# Altium PCB FullPCB.PcbDoc
Units mm, origin at the board's own origin, x right, y up, seen from the top; angles counter-clockwise.
Board outline 128.27 x 38.1 mm, 2 copper layers (Top Layer, Bottom Layer); 98 components, 52 nets, 246 pads, 2 vias.
Unrouted connection lines stored in the file: 25.
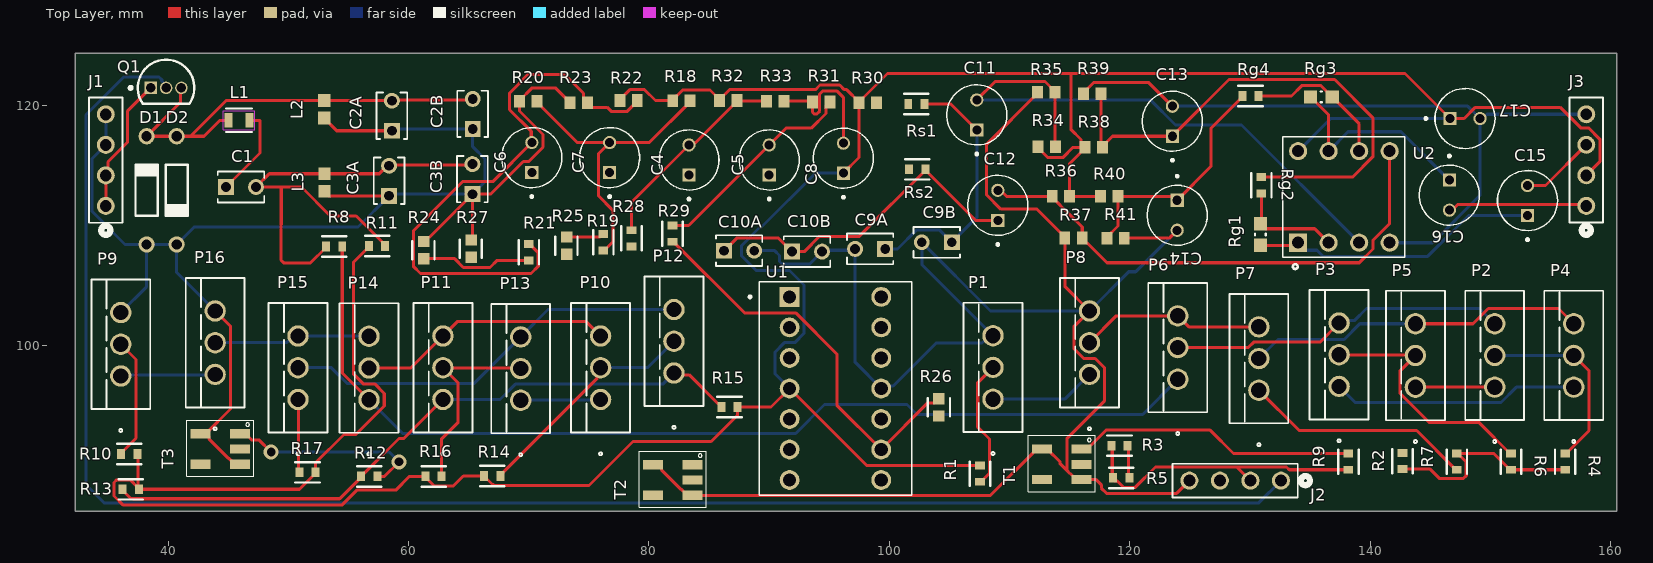
[diagram p0: Top Layer view]
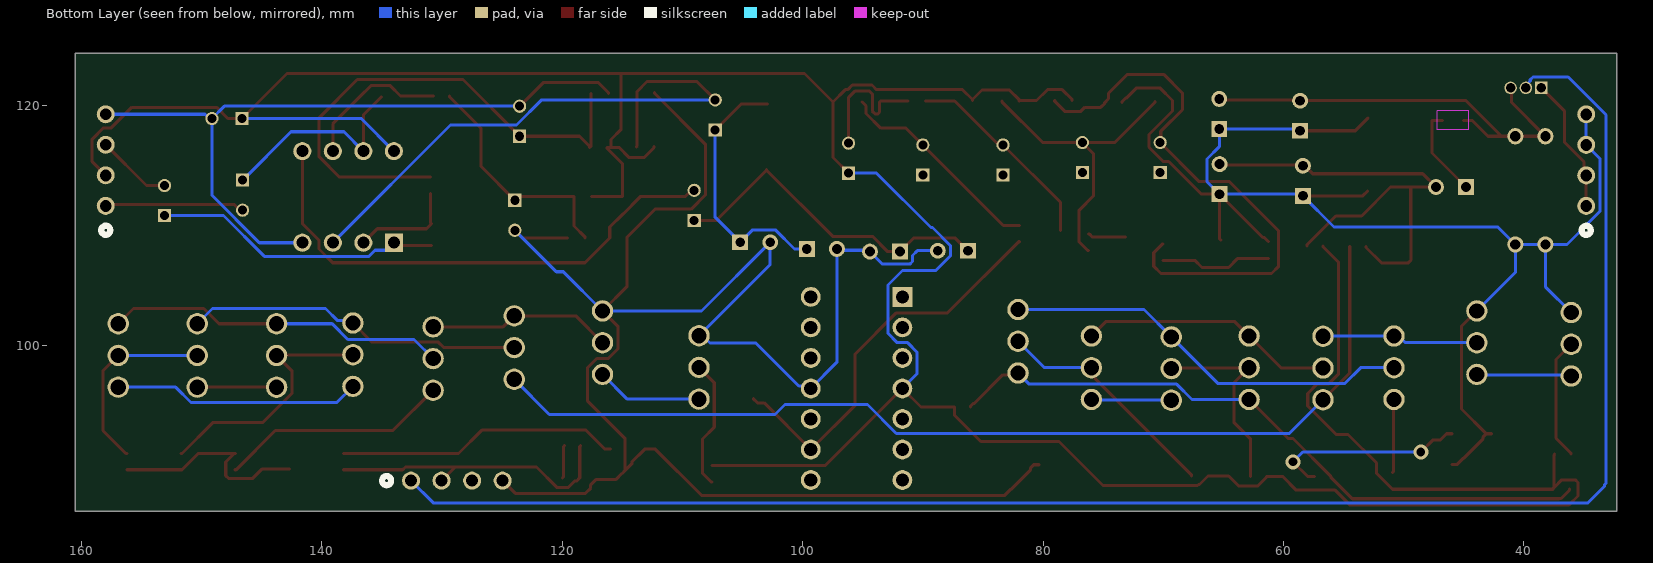
[diagram p1: Bottom Layer view, seen from below]
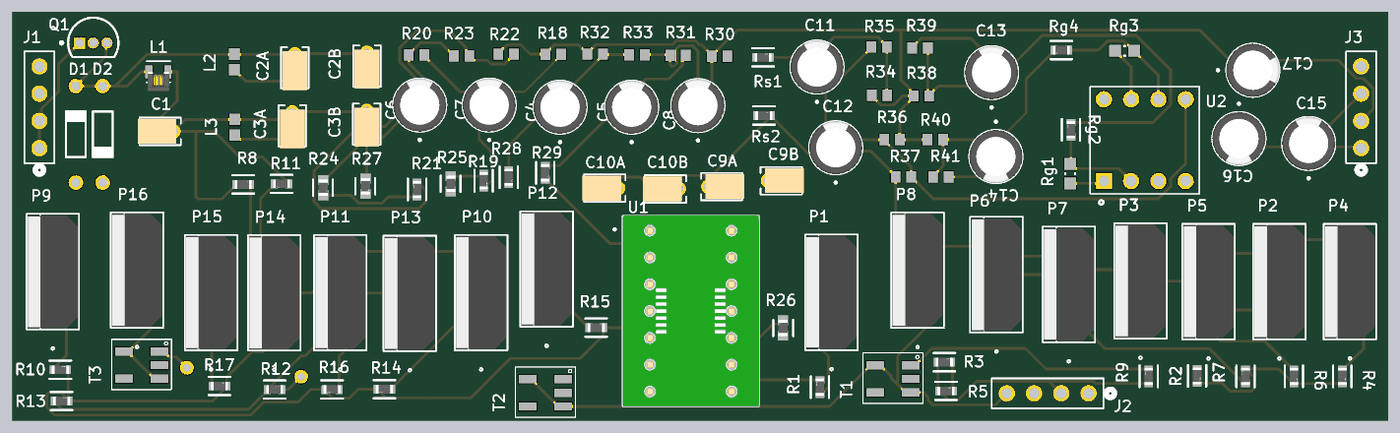
[diagram p2: 3D render of the assembled board from above, using the file's embedded part models]

## Layer stack, top to bottom
Top Solder: solder mask 0.0102, Solder Resist, Dk 3.5
Top Layer: signal copper 0.0356
Dielectric 1: dielectric 0.32, FR-4, Dk 4.8
Bottom Layer: signal copper 0.0356
Bottom Solder: solder mask 0.0102, Solder Resist, Dk 3.5

## Board outline
32.258,86.233 32.258,124.333 160.528,124.333 160.528,86.233

## Design rules (kind name [scope] priority, off if disabled: settings)
Clearance [All] p1: gap=0.254 ignorepadtopadclearanceinfootprint=FALSE
PolygonConnect [All] p1: connectstyle=Relief reliefconductorwidth=0.254 reliefentries=4 polygonreliefangle="90 Angle" airgapwidth=0.254
RoutingVias [All] p1: holewidth=0.711 width=1.27 viastyle="Through Hole" minholewidth=0.711 minwidth=1.27 maxholewidth=0.711 maxwidth=1.27
SolderMaskExpansion [All] p1: expansion=0.102 istentingtop=FALSE
SupplyNets "Schematic Supply Nets" [InNet('GND')] p1: voltage=0.000
Width [All] p1: maxlimit=0.254 minlimit=0.254 preferedwidth=0.254
30 further rules are at their usual default settings.

## Classes and differential pairs
component class U_SeriesSwitch: Antenna Q1
component class "U_Quadrature Mixers": P1 P2 P3 P4 P5 P6 P8 P9 P10 P11 P12 P13 P14 P15 P16 R1 R2 R3 R4 R5 R6 R7 R8 R9 R10 R11 R12 R13 R14 R15 R16 R17 T1 T2 T3
component class U_Limiter: D1 D2
component class "U_Differential Opamp": C4 C5 C6 C7 C8 R18 R19 R20 R21 R22 R23 R24 R25 R26 R27 R28 R29 R30 R31 R32 R33 U1
component class U_Bandpass: *1 *2 *3 C1 C2A C2B C3A C3B L1 L2 L3
component class "FULL HIERARCHICAL SCHEMATIC": J1 J2 J3
component class "U_Lowpass Amplifier": C9A C9B C10A C10B C11 C12 C13 C14 C15 C16 C17 R34 R35 R36 R37 R38 R39 R40 R41 Rg1 Rg2 Rg3 Rg4 Rs1 Rs2

## Components (designator, comment, footprint, x,y, rotation, side; value= is the part's Value field where it differs from the comment)
C1 "K103K10X7RF53L2" K103K10X7RF53L2_VIS 44.8,113.2 r0 top
C2A "K103K10X7RF53L2" K103K10X7RF53L2_VIS 58.606,117.882 r90 top
C2B "K103K10X7RF53L2" K103K10X7RF53L2_VIS 65.331,118.032 r90 top
C3A "K103K10X7RF53L2" K103K10X7RF53L2_VIS 58.375,112.465 r90 top
C3B "K103K10X7RF53L2" K103K10X7RF53L2_VIS 65.306,112.607 r90 top
C4 "ECA1CM100I" CAPPRD250W50D500H1100 83.325,115.45 r90 top
C5 "ECA1CM100I" CAPPRD250W50D500H1100 90,115.45 r90 top
C6 "ECA1CM100I" CAPPRD250W50D500H1100 70.25,115.65 r90 top
C7 "ECA1CM100I" CAPPRD250W50D500H1100 76.725,115.65 r90 top
C8 "ECA1CM100I" CAPPRD250W50D500H1100 96.175,115.6 r90 top
C9A "K103K10X7RF53L2" K103K10X7RF53L2_VIS 99.65,108.05 r180 top
C9B "K103K10X7RF53L2" K103K10X7RF53L2_VIS 105.2,108.6 r180 top
C10A "K103K10X7RF53L2" K103K10X7RF53L2_VIS 86.25,107.9 r0 top
C10B "K103K10X7RF53L2" K103K10X7RF53L2_VIS 91.9,107.825 r0 top
C11 "ECA1CM100I" CAPPRD250W50D500H1100 107.275,119.2 r90 top
C12 "ECA1CM100I" CAPPRD250W50D500H1100 109.025,111.675 r90 top
C13 "ECA1CM100I" CAPPRD250W50D500H1100 123.55,118.675 r90 top
C14 "ECA1CM100I" CAPPRD250W50D500H1100 123.95,110.85 r270 top
C15 "ECA1CM100I" CAPPRD250W50D500H1100 153.1,112.075 r90 top
C16 "ECA1CM100I" CAPPRD250W50D500H1100 146.6,112.525 r270 top
C17 "ECA1CM100I" CAPPRD250W50D500H1100 147.9,118.9 r0 top
D1 "1N4148" NXP-SOD27-2_V 38.2,112.925 r90 top
D2 "1N4148" NXP-SOD27-2_V 40.7,112.925 r270 top
J1 "PRPC004SAAN-RC" CONN4_PRPC004_SUL#1 34.8,111.63 r270 top
J2 "PRPC004SAAN-RC" CONN4_PRPC004_SUL#1 132.585,88.77 r0 top
J3 "PRPC004SAAN-RC" CONN4_PRPC004_SUL#2 157.99,111.635 r270 top
L1 "MURATA_LQW21FT2R0M0HL" MURATA_LQW21FT2R0M0HL_0 45.895,118.75 r0 top
L2 "BRC1608TR50M6" INDC1608X100N 52.975,119.675 r90 top
L3 "BRC1608TR50M6" INDC1608X100N 53.006,113.579 r90 top
P1 "IRF9640PBF" TO220AB_VIS 108.625,95.55 r90 top
P2 "IRF9640PBF" TO220AB_VIS 150.371,96.548 r90 top
P3 "IRF9640PBF" TO220AB_VIS 137.422,96.609 r90 top
P4 "IRF9640PBF" TO220AB_VIS 156.947,96.548 r90 top
P5 "IRF9640PBF" TO220AB_VIS 143.772,96.544 r90 top
P6 "IRF9640PBF" TO220AB_VIS 124,97.2 r90 top
P7 "IRF9640PBF" TO220AB_VIS 130.747,96.284 r90 top
P8 "IRF9640PBF" TO220AB_VIS 116.65,97.61 r90 top
P9 "IRF9640PBF" TO220AB_VIS 36.05,97.475 r90 top
P10 "IRF9640PBF" TO220AB_VIS 75.975,95.525 r90 top
P11 "IRF9640PBF" TO220AB_VIS 62.85,95.525 r90 top
P12 "IRF9640PBF" TO220AB_VIS 82.075,97.725 r90 top
P13 "IRF9640PBF" TO220AB_VIS 69.325,95.45 r90 top
P14 "IRF9640PBF" TO220AB_VIS 56.7,95.5 r90 top
P15 "IRF9640PBF" TO220AB_VIS 50.8,95.525 r90 top
P16 "IRF9640PBF" TO220AB_VIS 43.9,97.61 r90 top
Q1 "BS170" ONSC-TO-92-3-29-11 39.82,121.45 r0 top
R1 "RC0603FR-071KL" FP-RC0603-0_55-IPC_C 107.55,89.35 r90 top
R2 "RC0603FR-0710KL" FP-RC0603-0_55-IPC_C 142.703,90.398 r270 top
R3 "RC0603FR-0710KL" FP-RC0603-0_55-IPC_C 119.148,91.675 r0 top
R4 "RC0603FR-071KL" FP-RC0603-0_55-IPC_C 156.236,90.352 r270 top
R5 "RC0603FR-0710KL" FP-RC0603-0_55-IPC_C 119.3,89 r0 top
R6 "RC0603FR-071KL" FP-RC0603-0_55-IPC_C 151.725,90.352 r270 top
R7 "RC0603FR-0710KL" FP-RC0603-0_55-IPC_C 147.214,90.352 r90 top
R8 "RC0603FR-0725R5L" FP-RC0603-0_55-IPC_C 53.8,108.25 r0 top
R9 "RC0603FR-0725R5L" FP-RC0603-0_55-IPC_C 138.192,90.352 r90 top
R10 "RC0603FR-071KL" FP-RC0603-0_55-IPC_C 36.75,90.975 r0 top
R11 "RC0603FR-0710KL" FP-RC0603-0_55-IPC_C 57.373,108.3 r180 top
R12 "RC0603FR-0725R5L" FP-RC0603-0_55-IPC_C 56.727,89.125 r0 top
R13 "RC0603FR-0710KL" FP-RC0603-0_55-IPC_C 36.873,88.05 r0 top
R14 "RC0603FR-071KL" FP-RC0603-0_55-IPC_C 66.952,89.15 r180 top
R15 "RC0603FR-0710KL" FP-RC0603-0_55-IPC_C 86.698,94.9 r0 top
R16 "RC0603FR-071KL" FP-RC0603-0_55-IPC_C 62.075,89.125 r180 top
R17 "RC0603FR-0710KL" FP-RC0603-0_55-IPC_C 51.582,89.46 r0 top
R18 "ERJ-3EKF1003V" RESC1608X55X30ML15T15 82.7,120.375 r180 top
R19 "RC0603FR-071KL" FP-RC0603-0_55-IPC_C 76.2,108.598 r270 top
R20 "ERJ-3EKF1003V" RESC1608X55X30ML15T15 69.95,120.325 r0 top
R21 "RC0603FR-071KL" FP-RC0603-0_55-IPC_C 70,107.773 r90 top
R22 "ERJ-3EKF1003V" RESC1608X55X30ML15T15 78.3,120.4 r180 top
R23 "ERJ-3EKF1003V" RESC1608X55X30ML15T15 74.15,120.225 r0 top
R24 "CRCW06035K05FKEA" FP-CRCW0603-e3-IPC_B 61.25,107.95 r270 top
R25 "CRCW06035K05FKEA" FP-CRCW0603-e3-IPC_B 73.15,108.315 r270 top
R26 "CRCW06035K05FKEA" FP-CRCW0603-e3-IPC_B 104.1,94.865 r90 top
R27 "CRCW06035K05FKEA" FP-CRCW0603-e3-IPC_B 65.2,108.075 r270 top
R28 "RC0603FR-071KL" FP-RC0603-0_55-IPC_C 78.55,108.925 r270 top
R29 "RC0603FR-071KL" FP-RC0603-0_55-IPC_C 81.95,109.325 r270 top
R30 "ERJ-3EKF1003V" RESC1608X55X30ML15T15 98.2,120.2 r180 top
R31 "ERJ-3EKF1003V" RESC1608X55X30ML15T15 94.325,120.275 r0 top
R32 "ERJ-3EKF1003V" RESC1608X55X30ML15T15 86.6,120.4 r180 top
R33 "ERJ-3EKF1003V" RESC1608X55X30ML15T15 90.5,120.35 r180 top
R34 "ERJ-3EKF1003V" RESC1608X55X30ML15T15 113.1,116.55 r180 top
R35 "ERJ-3EKF1003V" RESC1608X55X30ML15T15 113.05,121.075 r0 top
R36 "ERJ-3EKF1003V" RESC1608X55X30ML15T15 114.275,112.425 r0 top
R37 "ERJ-3EKF1003V" RESC1608X55X30ML15T15 115.325,108.96 r0 top
R38 "ERJ-3EKF1003V" RESC1608X55X30ML15T15 117,116.5 r180 top
R39 "ERJ-3EKF1003V" RESC1608X55X30ML15T15 116.875,120.975 r0 top
R40 "ERJ-3EKF1003V" RESC1608X55X30ML15T15 118.3,112.425 r180 top
R41 "ERJ-3EKF1003V" RESC1608X55X30ML15T15 118.825,108.95 r180 top
Rg1 "RC0603FR-07330KL" RESC0603(1608)_M 130.875,109.25 r270 top value="330000.00 Ohm"
Rg2 "RC0603FR-0710KL" FP-RC0603-0_55-IPC_C 130.95,113.348 r90 top
Rg3 "RC0603FR-07330KL" RESC0603(1608)_M 135.95,120.7 r180 top value="330000.00 Ohm"
Rg4 "RC0603FR-0710KL" FP-RC0603-0_55-IPC_C 130.048,120.775 r180 top
Rs1 "RC0603FR-0710KL" FP-RC0603-0_55-IPC_C 102.25,120.1 r0 top
Rs2 "RC0603FR-0710KL" FP-RC0603-0_55-IPC_C 102.325,114.675 r0 top
T1 "CX2040LNLT" CX2040LNLT 116.002,91.39 r90 top
T2 "CX2040LNLT" CX2040LNLT 83.627,90.09 r90 top
T3 "CX2040LNLT" CX2040LNLT 45.975,92.67 r90 top
U1 "LCQT-TSSOP14" ARIES_LCQT-TSSOP14 95.51,96.44 r0 top
U2 "1-2199298-2" TE_1-2199298-2 137.825,112.375 r90 top

## Footprints (in the part's own frame and the unit in brackets; to place one, negate y for a bottom-side part, rotate by r counter-clockwise, add the part's x,y. Pads: shape width x height; smd on the part's side, far side on the other; paste and mask are expansions set on the pad)
ARIES_LCQT-TSSOP14 [mm]
  rect 1.65x1.65 / inner round 1.65 / far side rect 1.65x1.65 hole 1.1: 1(-3.81,7.62)
  round 1.65 hole 1.1: 2(-3.81,5.08) 3(-3.81,2.54) 4(-3.81,0) 5(-3.81,-2.54) 6(-3.81,-5.08) 7(-3.81,-7.62) 8(3.81,-7.62) 9(3.81,-5.08) 10(3.81,-2.54) 11(3.81,0) 12(3.81,2.54) 13(3.81,5.08) 14(3.81,7.62)
  silkscreen extent -7.2,-8.89 6.35,8.89, body extent -6.35,-8.89 6.35,8.89, height 5
CAPPRD250W50D500H1100 [mm]
  round 1.1 hole 0.75: N(1.25,0)
  rect 1.1x1.1 hole 0.75: P(-1.25,0)
  silkscreen extent -3.35,-2.5 2.5,2.5, body extent -2.5,-2.5 2.5,2.5, height 11
CONN4_PRPC004_SUL#1 [mil]
  round 59 / inner round 60 / far side round 59 hole 39 paste-99999 mask+0: 1(0,0) 2(-100,0) 3(-200,0) 4(-300,0)
  silkscreen extent -355,-55 95,55
CONN4_PRPC004_SUL#2 [mil]
  round 59 / inner round 60 / far side round 59 hole 39 paste-99999 mask+0: 2(-100,0) 3(-200,0) 4(-300,0) pt(0,0)
  silkscreen extent -355,-55 95,55
CX2040LNLT [mil] "RF AND WIRELESS BALUN TRANSFORMER"
  rect 30x65 smd: 1(0,0) 2(-50,0) 3(-100,0) 4(0,130) 6(-100,130)
  silkscreen extent -140,-45 45,175
FP-CRCW0603-e3-IPC_B [mm]
  rect 0.935x0.962 smd paste+0 mask+0: 1(-0.715,0) 2(0.715,0)
  silkscreen extent -0.75,-0.95 0.75,0.9, body extent -1.43,-0.73 1.43,0.73, height 0.25
FP-RC0603-0_55-IPC_C [mm]
  rect 0.659x0.812 smd paste+0 mask+0: 1(-0.677,0) 2(0.677,0)
  silkscreen extent -1.01,-0.85 1.01,0.85, body extent -1.11,-0.55 1.11,0.55, height 0.25
INDC1608X100N [mm]
  rect 1.06x1.02 smd: 1(-0.728,0) 2(0.728,0)
K103K10X7RF53L2_VIS [mil]
  rect 52x52 / inner round 60 / far side rect 52x52 hole 32 paste-99999 mask+0: 1(0,0)
  round 52 / inner round 60 / far side round 52 hole 32 paste-99999 mask+0: 2(98.43,0)
  silkscreen extent -27,-50 125,50, body extent -33,-46 109,46, height 142
MURATA_LQW21FT2R0M0HL_0 [mm]
  rect 0.66x1.2 smd: 1(-0.88,0) 2(0.88,0)
  Keep-Out Layer lines w0.1: -1.31,-0.8 1.31,-0.8 1.31,0.8 -1.31,0.8 -1.31,-0.8
  silkscreen extent -1.1,-0.98 1.1,0.98, body extent -1,-1.8 1,0, height 0.6
NXP-SOD27-2_V [mm] "SOD27, 2-Leads, Dia 1.85mm, Body Length 4.25mm, Pin Spacing 9mm"
  round 1.35 hole 0.85: 1(-4.5,0) 2(4.5,0)
  silkscreen extent -2.12,-0.93 2.13,0.92, body extent -4.78,-0.92 4.78,0.92, height 1.84
ONSC-TO-92-3-29-11 [mm] "TO, 3-Leads, Body Dia 4.7mm, Pitch 1.27mm"
  rect 1.05x1.05 hole 0.8: 1(-1.27,0)
  round 1.05 hole 0.8: 2(0,0) 3(1.27,0)
  silkscreen extent -3.07,-1.34 2.35,2.35, body extent -2.35,-1.33 2.36,2.36, height 7.87
RESC0603(1608)_M [mm] "Chip Resistor, Body 1.6x0.8mm, IPC Low Density"
  rect 1.1x1.1 smd: 1(-0.9,0) 2(0.9,0)
  silkscreen extent -0.05,-0.45 0.05,0.45, body extent -0.85,-0.47 0.85,0.47, height 0.6
RESC1608X55X30ML15T15 [mm] "Chip Resistor, 2-Leads, Body 1.60x0.80mm, IPC Low Density"
  rect 0.9x1.05 smd: 1(-0.725,0) 2(0.725,0)
  body extent -0.87,-0.48 0.87,0.48, height 0.55
TE_1-2199298-2 [mm]
  rect 1.508x1.508 hole 1: 1(-3.81,3.81)
  round 1.508 hole 1: 2(-3.81,1.27) 3(-3.81,-1.27) 4(-3.81,-3.81) 5(3.81,-3.81) 6(3.81,-1.27) 7(3.81,1.27) 8(3.81,3.81)
  silkscreen extent -6,-5.08 5,5.08
TO220AB_VIS [mil]
  round 70 / inner round 60 / far side round 70 hole 50 paste-99999 mask+0: 1(0,0) 2(103.94,0) 3(207.87,0)
  silkscreen extent -183,-96 316,97, body extent -103,-91 311,91, height 600

## Part data
C1 C2A C2B C3A C3B C9A C9B C10A C10B P1 P2 P3 P4 P5 P6 P7 P8 P9 P10 P11 P12 P13 P14 P15 P16: "No Description Available", Mfr_Name=Vishay
  C1 C2A C2B C3A C3B C9A C9B C10A C10B: Type="Ceramic Capacitor"
C4 C5 C6 C7 C8 C11 C12 C13 C14 C15 C16 C17: "10ÂµF 16V Aluminum Electrolytic Capacitors Radial, Can 2000 Hrs @ 85Â°C", Package="RADIAL-2 Panasonic", Check_prices=https://www.snapeda.com/parts/ECA1CM100I/Panasonic/view-part/?ref=eda, Digi-Key_Part_Number=P19513TB-ND, MF=Panasonic, MP=ECA1CM100I, SnapEDA_Link=https://www.snapeda.com/parts/ECA1CM100I/Panasonic/view-part/?ref=snap
D1 D2: library part CMP-0648-00002-1, "High-speed Diode, 100 V, 450 mA, 2-Pin SOD27, RoHS", Manufacturer="NXP Semiconductors", Cd="4 pF Max.", ComponentLink1Description="Manufacturer URL", ComponentLink1URL=http://www.nxp.com/, ComponentLink2Description=Datasheet, ComponentLink2URL=http://www.nxp.com/documents/data_sheet/1N4148_1N4448.pdf, ComponentLink3Description="Package Specification", ComponentLink3URL=http://www.nxp.com/documents/data_sheet/1N4148_1N4448.pdf, Configuration=Single, DatasheetVersion=Aug-04, IF="200 mA Max.", IFRM="450 mA", IFSM="4 A Max.", IR (VR="20 V)=25 nA", Mounting Technology="Through Hole", PackageDescription="2-Pin Hermetically Sealed Glass Package, Axial Leaded, Dia 1.85 mm, Body Length 4.25 mm, Lead Spread 25.4 mm", PackageReference=SOD27, PackageVersion=Aug-04, PartNumber=1N4148, RoHS=TRUE, Trr="4 ns Max.", VF (IF="10 mA)=1 V", VR="100 V Max."
J1 J2 J3: "No Description Available", Mfr_Name=Sullins, RefDes=RefDes, Type="Headers, Male Pins"
L1: "FIXED IND 2UH 450MA POWRTRN", Package=None, Check_prices=https://www.snapeda.com/parts/LQW21FT2R0M0HL/Murata/view-part/?ref=eda, Digi-Key_Part_Number=490-LQW21FT2R0M0HLTR-ND, MF="Murata Electronics", MP=LQW21FT2R0M0HL, Purchase-URL=https://pricing.snapeda.com/search/part/LQW21FT2R0M0HL/?ref=eda, SnapEDA_Link=https://www.snapeda.com/parts/LQW21FT2R0M0HL/Murata/view-part/?ref=snap
L2 L3: "Inductor Power Chip Wirewound 500nH 20% 6MHz Ferrite 1.05A 117mOhm DCR 0603 T/R", Package=None, Availability=Unavailable, MP=BRC1608TR50M6, Price=None
Q1: library part CMP-1058-00929-1, "Small Signal MOSFET, 500 mA, 60 V, N-Channel, 3-Pin TO-92, Bulk Box", Manufacturer="On Semiconductor", Package Type=TO-92, Channel Polarity="N Channel", ComponentLink1Description="Manufacturer URL", ComponentLink1URL=http://www.onsemi.com/, ComponentLink2Description=Datasheet, ComponentLink2URL=http://www.onsemi.com/pub_link/Collateral/BS170-D.PDF, ComponentLink3Description="Package Specification", ComponentLink3URL=http://www.onsemi.cn/pub_link/Collateral/2N6426-D.PDF, Configuration=Single, DatasheetVersion="Rev. 6", ID Max (A)=0.5, Mounting Technology="Through Hole", PackageDescription="3-Pin Transistor Outline, Body 4.825 x 3.685 mm, Pitch 1.27 mm", PackageReference=TO-92-3-29-11_AM_SL, PackageVersion="Rev. AM", Packing="Bulk Box", PartNumber=BS170, PD Max (W)=0.35, V(BR)DSS Min (V)=60, VGS Max (V)=20, VGS(th) Max (V)=3
R1 R4 R6 R8 R9 R10 R12 R14 R16 R19 R21 R28 R29: library part CMP-1659-00009-5, "RES 1K OHM 1% 1/10W 0603", Case Code (Imperial)=0603, Case Code (Metric)=1608, Max Operating Temperature=155°C, Max Power Dissipation=100mW, Min Operating Temperature=-55°C, Resistance=1kR, Resistance Tolerance=1%, Resistor Type="Thick Film", Temperature Coefficient=100ppm/°C, Voltage Rating=50V, Case/Package=0603, Construction=Rectangular, Contact Plating=Tin, Depth=0.8mm, Features="Moisture Resistant", Height=0.45mm, Lead Free="Lead Free", Length=1.6mm, Military Standard=Not, Number of Terminations=2, Packaging="Tape and Reel", Power Rating=100mW, Radiation Hardening=No, REACH SVHC="No SVHC", RoHS Compliant=Yes, Series=RC, Size Code=0603, Technology="THICK FILM", Termination=SMD/SMT, Tolerance=1%
R2 R3 R5 R7 R11 R13 R15 R17 Rg2 Rg4 Rs1 Rs2: library part CMP-2100-03664-2, "RES 10K OHM 1% 1/10W 0603", Case Code (Imperial)=0603, Case Code (Metric)=1608, Max Operating Temperature=155°C, Max Power Dissipation=100mW, Min Operating Temperature=-55°C, Resistance=10kR, Resistance Tolerance=1%, Resistor Type="Thick Film", Temperature Coefficient=100ppm/°C, Voltage Rating=75V, Voltage Rating (DC)=50V, Case/Package=0603, Construction=Rectangular, Depth=0.8mm, Features="Moisture Resistant", Height=0.45mm, Lead Free="Lead Free", Lead Pitch=0.3mm, Length=1.6mm, Military Standard=Not, Number of Pins=2, Number of Terminations=2, Packaging="Tape and Reel", Power Rating=100mW, RoHS Compliant=Yes, Series=RC, Size Code=0603, Termination=SMD/SMT, Tolerance=1%, Weight=7.1E-05oz, Width=0.8mm
R18 R20 R22 R23 R30 R31 R32 R33 R34 R35 R36 R37 R38 R39 R40 R41: library part CMP-2000-00182-1, Manufacturer=Panasonic, Part Number=ERJ-3EKF1003V
R24 R25 R26 R27: library part CMP-02407-010650-1, "RES Thick Film, 5.05kΩ, 1%, 0.1W, 100ppm/°C, 0603", Case Code (Imperial)=0603, Case Code (Metric)=1608, Max Operating Temperature=155°C, Max Power Dissipation=100mW, Min Operating Temperature=-55°C, Package Quantity=5000, Resistance=5.05kR, Temperature Coefficient=100ppm/°C, Tolerance=1%, Voltage Rating=75V, Case/Package=0603, Composition="Thick Film", Features="Automotive AEC-Q200", Height=0.02inch, Lead Free="Lead Free", Length=0.061inch, Number of Pins=2, Number of Terminations=2, Packaging="Tape and Reel", Power Rating=100mW, Termination=SMD/SMT, Voltage Rating (DC)=75V, Weight=7.1E-05oz, Width=0.85mm
Rg1 Rg3: library part CMP-1012-00793-1, "330K 0.1W 1% 0603 (1608 Metric)  SMD", Case-EIA=0603, Case-Metric=1608, Power="0.1 W", Tolerance="1 %", Technology=SMT
T1 T2 T3: "BALUN 1MHZ-500MHZ 75/75 5SMD MOD", Frequency Range="1MHz ~ 500MHz", Manufacturer="Pulse Electronics", Max Operating Temperature="85 °C", Min Operating Temperature="-40 °C", Package="5-SMD Module", Depth=3.81mm, Insertion Loss (Max)=0.9dB, Length=3.81mm, Manufacturer Part=CX2040LNLT, Mounting Type="Surface Mount", Number of Pins=5, RoHS Compliant=Yes, Transformer Type="RF and Wireless Balun"
U1: "SOCKET ADAPTER TSSOP TO 14DIP", Package="TSSOP-14 Aries", Check_prices=https://www.snapeda.com/parts/LCQT-TSSOP14/Aries+Electronics/view-part/?ref=eda, MF="Aries Electronics", MP=LCQT-TSSOP14, SnapEDA_Link=https://www.snapeda.com/parts/LCQT-TSSOP14/Aries+Electronics/view-part/?ref=snap
U2: "8 _2 x 4_ Pos DIP, 0.3 _7.62mm_ Row Spacing Socket Tin Through Hole", Package=None, Availability=Unavailable, MF="TE Connectivity", MP=1-2199298-2, Price=None, SnapEDA_Link=https://www.snapeda.com/parts/1-2199298-2/TE%20Connectivity%20AMP%20Connectors/view-part/2761758/?ref=snap, TE_purchase_URL=https://www.te.com/usa-en/product-1-2199298-2.html?te_bu=Cor&te_type=disp&te_campaign=seda_glo_cor-seda-global-disp-prtnr-fy19-seda-model-bom-cta_sma-317_1&elqCampaignId=32493

## Via types
v1: diameter 1.27, hole 0.711, Top Layer to Bottom Layer, 2 vias

## Nets (pads, with @x,y where several pads share a name; then routed paths per layer and width w, separated by ;. In a path a pad name is that pad's centre, name@x,y a point inside that pad or via, vN(x,y) a via of type N, cw(c..) or ccw(c..) an arc to the next point about the centre after c; other vN are vias at no path point)
5V: C8.P C17.P J3.2 R1.2 R2.2 R3.2 R4.2 R5.2 R6.2 R7.2 R10.2 R11.2 R13.2 R14.2 R15.2 R16.2 R17.2 R18.2 R22.2 R30.2 R32.2 R34.2 R36.2 R38.2 R40.2 U1.4 U2.8 | length 306
  Top Layer w0.254: R10.2 37.488,90.913 R13.2@37.488,88.188 ; R11.2 56.697,108.223 55.43,106.957 55.43,97.614 56.224,96.82 57.176,96.82 57.97,96.026 57.97,94.974 55.607,92.611 54.622,92.611 52.258,90.247 R17.2 52.258,89.383 50.925,88.05 R13.2 37.55,88.127 R13.2@37.488,88.188 ; R22.2 77.575,120.475 78.406,121.306 79.633,121.306 80.539,120.4 81.95,120.4 R18.2 81.975,120.45 82.806,121.281 85.069,121.281 R32.2@85.875,120.475 ; R32.2 R32.2@85.875,120.475 ; C8.P 97.475,115.65 R30.2 R30.2@97.475,120.275 ; R1.2 98.113,90.027 U1.4 90.16,94.9 R15.2 87.375,94.225 85.175,92.025 78.675,92.025 75.013,88.363 67.141,88.363 67.054,88.45 66.975,88.45 R14.2 64.55,89.15 63.738,88.338 62.109,88.338 61.398,89.048 R16.2 60.078,89.125 58.926,87.973 55.693,87.973 54.475,86.755 36.217,86.755 35.486,87.486 35.486,88.614 35.709,88.837 36.84,88.837 R13.2@37.488,88.188 ; R34.2 112.375,116.475 113.206,115.644 114.433,115.644 115.289,116.5 R38.2 116.275,116.425 115,115.15 R36.2 R40.2 ; R38.2@116.025,116.503 115.952,116.576 115.952,117.148 115.1,118 115.1,122.647 ; R3.2 119.901,91.599 119.901,89.076 R5.2 ; U2.8 U2.8@134.215,116.385 ; R2.2 145.002,89.722 145.758,88.965 147.778,88.965 148.001,89.188 148.001,90.318 147.291,91.028 R7.2 150.295,91.028 151.648,89.675 R6.2 R4.2 ; J3.2 159.12,115.305 159.12,117.183 158.179,118.125 157.522,118.125 155.816,119.831 148.764,119.831 147.833,118.9 C17.P 142.903,122.647 115.1,122.647 ; R32.2@85.875,120.475 86.706,121.306 93.849,121.306 94.232,121.689 95.868,121.689 96.251,121.306 96.444,121.306 R30.2@97.475,120.275 ; R30.2@97.475,120.275 99.847,122.647 115.1,122.647
  Bottom Layer w0.254: U1.4 90.494,97.646 90.494,99.48 91.264,100.25 92.136,100.25 92.906,101.02 92.906,105.043 91.693,106.256 88.922,106.256 87.709,107.469 87.709,108.331 89.202,109.825 89.325,109.825 93.85,114.35 C8.P ; U2.8 136.73,118.9 C17.P
GND: C2A.1 C2B.1 C3A.1 C3B.1 C8.N C9A.2 C9B.2 C10A.2 C10B.2 C13.N C14.N C17.N D1.1 D2.2 J1.3 J1.4 J2.4 J3.4 L2.1 L3.1 P1.3 P8.3 P9.3 P16.3 R20.1 R23.1 R24.1 R27.1 R31.1 R33.1 R35.1 R37.1 R39.1 R41.1 T1.3 T1.4 T2.3 T2.4 T3.3 T3.4 U1.11 U2.4 | length 362.1
  Top Layer w0.254: T3.4 T3.4@43.118,92.67 ; P16.3 45.17,101.62 45.17,94.723 T3.4@43.118,92.67 ; T3.3 45.531,90.13 45.023,90.638 44.992,90.638 43.372,92.258 43.372,92.416 T3.4@43.118,92.67 ; L2.1 52.975,118.927 54.02,117.882 C2A.1 ; L3.1 53.006,112.848 53.389,112.465 C3A.1 C3A.1@57.91,112 ; R24.1@61.525,108.94 R24.1 61.591,109.006 61.706,109.006 C3B.1 ; R27.1@65.214,108.79 R27.1 65.306,108.897 C3B.1 ; R23.1 73.425,120.3 73.102,120.623 73.027,120.623 72.2,121.45 70.275,121.45 69.225,120.4 R20.1 69.225,119.53 71.181,117.574 71.181,116.514 69.998,115.331 69.542,115.331 66.818,112.607 C3B.1 ; T2.4 80.77,90.09 81.024,89.836 81.024,89.678 82.644,88.058 82.675,88.058 83.183,87.55 T2.3 108.416,87.55 112.256,91.39 T1.4 113.145,91.39 114.209,90.326 114.209,90.168 114.796,89.581 ; R33.1 93.525,120.35 R31.1 93.6,119.425 93.749,119.276 93.959,119.276 94.201,119.518 94.201,120.94 94.442,121.181 95.658,121.181 96.175,120.664 C8.N ; R35.1 112.325,121 108.094,116.769 108.094,112.539 109.277,111.356 112.279,111.356 114.6,109.035 R37.1 114.6,104.94 P8.3 115.38,101.62 115.38,99.724 116.174,98.93 117.126,98.93 117.92,98.136 117.92,95.421 114.796,92.296 114.796,89.581 ; R39.1 116.15,121.05 116.981,121.881 121.594,121.881 C13.N ; R41.1 123.283,108.95 123.933,109.6 C14.N ; J2.4 123.908,87.713 120.682,87.713 120.674,87.705 119.279,87.705 119.271,87.713 118.061,87.713 117.635,88.139 117.635,88.424 117.209,88.85 T1.3 115.558,88.85 115.05,89.358 115.019,89.358 114.796,89.581
  Bottom Layer w0.254: J1.4 J1.3 33.67,115.58 33.67,111.162 36.407,108.425 D1.1 ; P9.3 38.2,104.905 D1.1 ; P16.3 40.7,106.09 D2.2 ; C2A.1 58.756,118.032 C2B.1 65.331,116.554 66.348,115.538 66.348,113.648 C3B.1 58.517,112.607 C3A.1 55.785,109.875 42.15,109.875 D2.2 ; C10A.2 90.453,107.9 90.859,107.495 90.859,107.007 91.082,106.784 93.359,106.784 C10B.2 94.512,107.938 97.037,107.938 C9A.2 97.15,107.938 97.15,98.61 U1.11 99.521,96.641 100.316,96.641 103.9,100.225 107.714,100.225 108.319,100.83 P1.3 102.7,106.755 C9B.2 108.41,102.89 P8.3 119.91,106.15 120.5,106.15 C14.N ; C13.N 148.125,119.925 C17.N ; U2.4 145.207,108.565 149.15,112.508 C17.N ; J3.4 149.734,119.255 149.379,118.9 C17.N ; D1.1 D2.2
LO_F1_0: J2.3 P11.1 P12.1 R12.1 R13.1 R15.1 | length 55.8
  Top Layer w0.254: R13.1 36.197,87.973 36.884,87.286 37.04,87.286 37.063,87.263 54.265,87.263 56.05,89.048 R12.1 59.194,92.269 59.594,92.269 P11.1 ; P12.1 82.223,97.577 83.345,97.577 85.743,95.179 85.819,95.179 86.022,94.977 R15.1
  Bottom Layer w0.254: P11.1 67.604,95.525 68.874,96.795 81.145,96.795 P12.1
LO_F1_90: J2.2 R3.1 R5.1 R9.1 | length 25.1
  Top Layer w0.254: R3.1 118.547,91.599 118.547,88.999 118.826,88.721 118.982,88.721 119.49,88.213 120.464,88.213 122.151,89.9 133.053,89.9 133.278,89.675 R9.1 ; 128.915,89.9 J2.2
Low_Pass_0Deg: C11.N R34.1 R35.2 U2.3 | length 48.8
  Top Layer w0.254: C11.N 108.806,121.981 112.944,121.981 113.775,121.15 R35.2 113.775,116.6 R34.1
  Bottom Layer w0.254: C11.N 121.708,120.45 123.802,118.356 129.304,118.356 U2.3
Low_Pass_90Deg: C12.N R36.1 R37.2 U2.5 | length 43.5
  Top Layer w0.254: C12.N 109.254,112.925 109.754,112.425 R36.1 113.55,112.35 114.954,110.946 114.969,110.946 116.05,109.866 R37.2 118.11,106.9 139.1,106.9 140.248,108.048 140.248,108.783 141.635,110.17 U2.5
NetC1_1: C1.1 L1.2 | length 7.6
  Top Layer w0.254: C1.1 47.636,116.036 47.636,118.75 L1.2
NetC1_2: C1.2 C3A.2 C3B.2 L3.2 R2.1 R8.1 R11.1 | length 42.2
  Top Layer w0.254: R8.1 53.123,108.173 51.838,106.888 49.603,106.888 49.38,107.111 49.38,110.071 49.401,110.092 49.401,113.051 49.252,113.2 ; R11.1 58.05,108.377 55.639,110.787 53.491,110.787 51.078,113.2 49.252,113.2 ; C3B.2 65.235,115.036 58.446,115.036 C3A.2 58.218,114.965 57.56,114.307 L3.2 48.407,114.307 C1.2 49.252,113.2
NetC2A_2: C2A.2 C2B.2 D1.2 D2.1 L1.1 L2.2 Q1.3 | length 37.4
  Top Layer w0.254: Q1.3 41.022,121.382 41.022,120.247 D1.2 D2.1 41.85,117.425 ; L1.1 44.304,118.75 42.979,117.425 41.85,117.425 ; C2B.2 65.256,120.457 58.681,120.457 C2A.2 52.996,120.382 L2.2 52.954,120.382 44.807,120.382 41.85,117.425
NetC4_N: C4.N R28.1 R32.1 R33.2 | length 17
  Top Layer w0.254: R28.1 78.55,111.925 C4.N 83.487,116.862 83.862,116.862 87.35,120.35 R33.2
NetC4_P: C4.P P3.2 P5.2 R6.1 | length 21.4
  Top Layer w0.254: P3.2 137.455,99.216 143.74,99.216 P5.2 142.502,97.914 142.502,96.018 144.896,93.624 149.052,93.624 151.648,91.028 R6.1
NetC5_N: C5.N R29.1 R30.1 R31.2 | length 17.7
  Top Layer w0.254: R29.1 83.302,110.002 C5.N 91.394,118.094 93.495,118.094 94.727,119.326 94.727,119.952 R31.2
NetC5_P: C5.P P2.2 P4.2 R4.1 | length 16.1
  Top Layer w0.254: R4.1 156.313,91.028 158.217,92.932 158.217,97.918 P4.2
  Bottom Layer w0.254: P2.2 P4.2
NetC6_N: C6.N R21.2 R22.1 R23.2 | length 47.1
  Top Layer w0.254: R21.2 70.077,108.45 70.787,107.74 70.787,106.609 70.181,106.003 60.994,106.003 60.388,106.609 60.388,109.548 64.488,113.648 66.998,113.648 C6.N 70.205,116.945 70.205,117.831 68.394,119.642 68.394,121.008 69.961,122.575 72.975,122.575 74.552,120.998 74.552,120.548 R23.2 74.875,120.15 75.198,119.827 76.524,119.827 76.857,119.494 78.194,119.494 79.025,120.325 R22.1
NetC6_P: C6.P P11.2 P13.2 R16.1 | length 16.6
  Top Layer w0.254: R16.1 62.752,92.259 64.12,93.627 64.12,96.895 P11.2 62.887,98.127 69.287,98.127 P13.2
NetC7_N: C7.N R18.1 R19.2 R20.2 | length 25.9
  Top Layer w0.254: R20.2 70.675,120.25 74.025,116.9 C7.N ; R19.2 76.277,107.922 76.987,108.632 76.987,111.273 75.794,112.466 75.794,115.969 C7.N ; R18.1 83.425,120.3 80.025,116.9 C7.N
NetC7_P: C7.P P10.2 P12.2 R14.1 | length 19.5
  Top Layer w0.254: R14.1 67.628,89.227 75.683,97.282 75.683,97.873 P10.2
  Bottom Layer w0.254: P10.2 79.875,98.165 P12.2
NetC9A_1: C9A.1 C9B.1 C11.P Rs1.2 | length 22.1
  Top Layer w0.254: Rs1.2 105.125,120.1 C11.P
  Bottom Layer w0.254: C9A.1 100.677,108.05 102.269,109.641 104.159,109.641 C9B.1 107.275,110.675 C11.P
NetC10A_1: C10A.1 C10B.1 C12.P Rs2.2 | length 28.3
  Top Layer w0.254: C10A.1 87.291,108.941 90.784,108.941 C10B.1 92.927,107.825 94.194,109.091 97.495,109.091 Rs2.2@103.002,114.598 ; Rs2.2 Rs2.2@103.002,114.598 ; C12.P 107.175,110.425 Rs2.2@103.002,114.598
NetC13_P: C13.P R38.1 R39.2 Rg2.2 | length 44
  Top Layer w0.254: R39.2 117.6,116.625 R38.1 117.725,116.575 118.575,117.425 C13.P 128.264,122.139 137.05,122.139 140.23,118.959 140.23,115.715 138.54,114.025 Rg2.2
NetC14_P: C14.P R40.1 R41.2 Rg4.2 | length 19.8
  Top Layer w0.254: R41.2 118.1,109.025 119.025,109.95 R40.1 123.625,112.425 C14.P 126.771,114.921 126.771,118.098 129.372,120.698 Rg4.2
NetC15_P: C15.P Rg1.2 U2.1 | length 24.2
  Top Layer w0.254: Rg1.2 133.8,108.35 U2.1
  Bottom Layer w0.254: U2.1 134.642,107.938 135.577,107.938 136.085,107.43 144.79,107.43 148.185,110.825 C15.P
NetC16_P: C16.P Rg3.2 U2.7 | length 17.9
  Top Layer w0.254: Rg3.2 136.555,119.195 U2.7 ; C16.P@146.325,114.05 C16.P
  Bottom Layer w0.254: U2.7 138.17,117.8 142.575,117.8 C16.P
NetP1_1: P1.1 P8.1 | length 8.9
  Bottom Layer w0.254: P1.1 114.59,95.55 P8.1
NetP1_2: P1.2 R1.1 | length 10.8
  Top Layer w0.254: R1.1 107.627,88.673 108.337,89.384 108.337,92.239 107.355,93.221 107.355,96.92 P1.2
NetP2_1: P2.1 P5.1 T1.6 | length 6.6
  Top Layer w0.254: P5.1 143.774,96.546 150.369,96.546 P2.1
NetP2_3: P2.3 P3.3 P6.2 | length 28.2
  Top Layer w0.254: P6.2 129.867,99.84 130.321,100.294 135.827,100.294 P3.3
  Bottom Layer w0.254: P3.3 137.615,102.081 138.692,102.081 139.705,103.094 149.105,103.094 P2.3
NetP3_1: P3.1 P4.1 | length 20.6
  Bottom Layer w0.254: P3.1 138.757,95.274 150.894,95.274 152.167,96.548 P4.1
NetP4_3: P4.3 P5.3 P7.2 | length 28.5
  Top Layer w0.254: P5.3 148.572,101.824 149.845,103.098 155.677,103.098 P4.3
  Bottom Layer w0.254: P7.2 132.342,100.519 137.848,100.519 139.153,101.824 P5.3
NetP6_1: P6.1 P14.1 R8.2 T2.1 | length 84.7
  Top Layer w0.254: R8.2 54.477,97.723 P14.1
  Bottom Layer w0.254: P14.1 59.506,92.694 92.2,92.694 94.612,95.106 101.468,95.106 102.294,94.28 121.08,94.28 P6.1
NetP6_3: P6.3 P7.3 P8.2 | length 15.4
  Top Layer w0.254: P8.2 118.88,102.48 P6.3 124.916,101.564 P7.3
NetP7_1: P7.1 P15.1 R7.1 R17.1 T2.6 | length 25.3
  Top Layer w0.254: P15.1 50.853,95.472 50.853,89.513 R17.1 ; P7.1 134.096,92.935 143.877,92.935 147.137,89.675 R7.1
NetP9_1: P9.1 P16.1 | length 7.9
  Bottom Layer w0.254: P9.1 36.117,97.542 43.833,97.542 P16.1
NetP9_2: P9.2 R10.1 | length 10.2
  Top Layer w0.254: P9.2 37.32,98.845 37.32,92.298 36.073,91.052 R10.1
NetP10_1: P10.1 P13.1 T3.6 | length 6.7
  Bottom Layer w0.254: P13.1 69.363,95.488 75.937,95.488 P10.1
NetP10_3: P10.3 P11.3 P14.2 | length 21.4
  Top Layer w0.254: P14.2 60.185,98.14 P11.3 64.045,102 74.78,102 P10.3
NetP12_3: P12.3 P13.3 P15.2 | length 34.4
  Bottom Layer w0.254: P15.2 53.572,98.165 54.867,96.87 65.465,96.87 P13.3 71.6,103.005 P12.3
NetP14_3: P14.3 P15.3 P16.2 | length 13
  Bottom Layer w0.254: P16.2 49.833,100.25 50.388,100.805 P15.3 50.812,100.793 56.687,100.793 P14.3
NetR9_2: R9.2 T1.1 | length 23.6
  Top Layer w0.254: T1.1 116.447,91.39 118.027,92.97 126.69,92.97 128.632,91.028 R9.2
NetR12_2: R12.2 T3.1 | length 16.5
  Top Layer w0.254: T3.1 46.42,92.67 46.928,92.162 47.538,92.162 v1(48.55,91.15) ; R12.2 58,89.125 v1(59.2,90.325)
  Bottom Layer w0.254: v1(48.55,91.15) 58.375,91.15 v1(59.2,90.325)
NetR19_1: R19.1 R25.1 U1.6 | length 3.2
  Top Layer w0.254: R25.1 75.879,109.031 76.123,109.275 R19.1
NetR21_1: R21.1 R24.2 U1.5 | length 9.3
  Top Layer w0.254: R24.2 63.828,107.235 64.552,106.511 66.776,106.511 67.361,107.097 R21.1
NetR25_2: R25.2 Rs2.1 U1.7
NetR26_1: R26.1 Rs1.1 U1.8
NetR26_2: R26.2 R29.2 U1.9 | length 33.5
  Top Layer w0.254: R29.2 82.027,108.648 87.949,102.726 92.2,102.726 95.626,99.299 95.626,95.054 U1.9 103.2,95.24 103.759,95.24 R26.2
NetR27_2: R27.2 R28.2 U1.10
NetRg1_1: Rg1.1 Rg2.1 U2.2 | length 8.9
  Top Layer w0.254: Rg2.1 130.95,110.225 Rg1.1 131.298,109.727 135.393,109.727 U2.2
NetRg3_1: Rg3.1 Rg4.1 U2.6 | length 12.3
  Top Layer w0.254: Rg4.1 133.456,120.775 134.312,121.631 135.919,121.631 Rg3.1 139.095,118.455 U2.6
RX_I: C16.N J3.pt | length 11.6
  Top Layer w0.254: C16.N 146.829,111.275 147.31,111.756 157.869,111.756 J3.pt
RX_Q: C15.N J3.3 | length 6.3
  Top Layer w0.254: C15.N 154.6,113.325 J3.3
RX_SIG: J1.1 J1.2 Q1.1 | length 11.4
  Top Layer w0.254: J1.1 J1.2 34.989,114.359 34.989,115.3 36.595,116.907 36.595,119.495 Q1.1
TXEN: J2.1 Q1.2 | length 140.1
  Bottom Layer w0.254: Q1.2 39.82,121.665 39.456,122.029 39.456,122.133 39.233,122.356 36.308,122.356 33.162,119.21 33.162,88.538 33.275,88.425 33.275,88.3 34.65,86.925 130.74,86.925 J2.1
pads on no net: T1.2 T2.2 T3.2 U1.1 U1.2 U1.3 U1.12 U1.13 U1.14

## Silkscreen, mask and mechanical layers (free items; w line width, h text height)
Mechanical 1:
  the board outline again, w0.254

## Dimensions
132.585,88.77 to 160.528,86.233 on Mechanical 1
132.585,88.77 to 160.528,86.233 on Mechanical 1
157.99,119.255 to 160.528,124.333 on Mechanical 1
157.99,119.255 to 160.528,124.333 on Mechanical 1
32.258,124.333 to 34.8,119.25 on Mechanical 1
34.8,119.25 to 32.258,124.333 on Mechanical 1
32.258,124.333 to 32.258,86.233 on Mechanical 1
32.258,124.333 to 160.528,124.333 on Mechanical 1

## Text inside footprints (layer, text, board x,y; h text height)
P1: Mechanical 13 "TAB" at 107.253,97.714 h1 r90
P2: Mechanical 13 "TAB" at 149,98.711 h1 r90
P3: Mechanical 13 "TAB" at 136.051,98.773 h1 r90
P4: Mechanical 13 "TAB" at 155.575,98.711 h1 r90
P5: Mechanical 13 "TAB" at 142.401,98.708 h1 r90
P6: Mechanical 13 "TAB" at 122.628,99.364 h1 r90
P7: Mechanical 13 "TAB" at 129.376,98.448 h1 r90
P8: Mechanical 13 "TAB" at 115.278,99.774 h1 r90
P9: Mechanical 13 "TAB" at 34.678,99.639 h1 r90
P10: Mechanical 13 "TAB" at 74.603,97.689 h1 r90
P11: Mechanical 13 "TAB" at 61.478,97.689 h1 r90
P12: Mechanical 13 "TAB" at 80.703,99.889 h1 r90
P13: Mechanical 13 "TAB" at 67.953,97.614 h1 r90
P14: Mechanical 13 "TAB" at 55.328,97.664 h1 r90
P15: Mechanical 13 "TAB" at 49.428,97.689 h1 r90
P16: Mechanical 13 "TAB" at 42.528,99.774 h1 r90